# Altium PCB GTL3_Inverter.PcbDoc
Units mm, origin at the board's own origin, x right, y up, seen from the top; angles counter-clockwise.
Board outline 63.5 x 37.97 mm, 2 copper layers (Top Layer, Bottom Layer), stack 1.544 mm thick; 11 components, 12 nets, 42 pads, 11 vias.
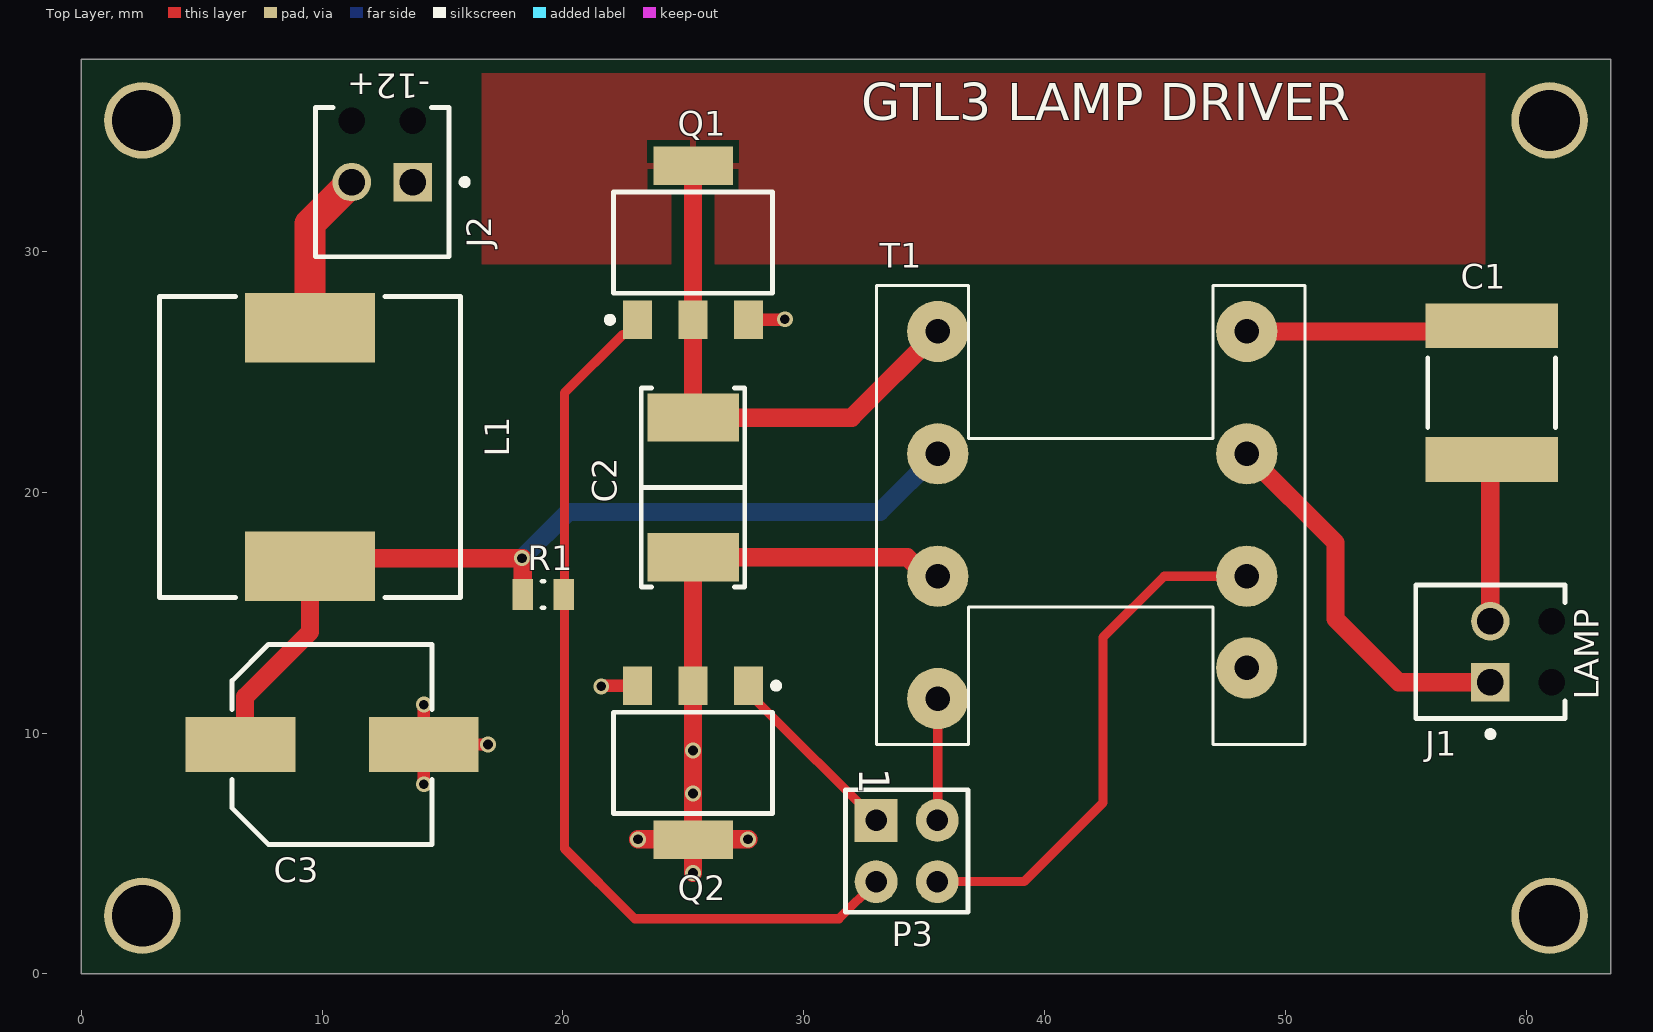
[diagram p0: Top Layer view]
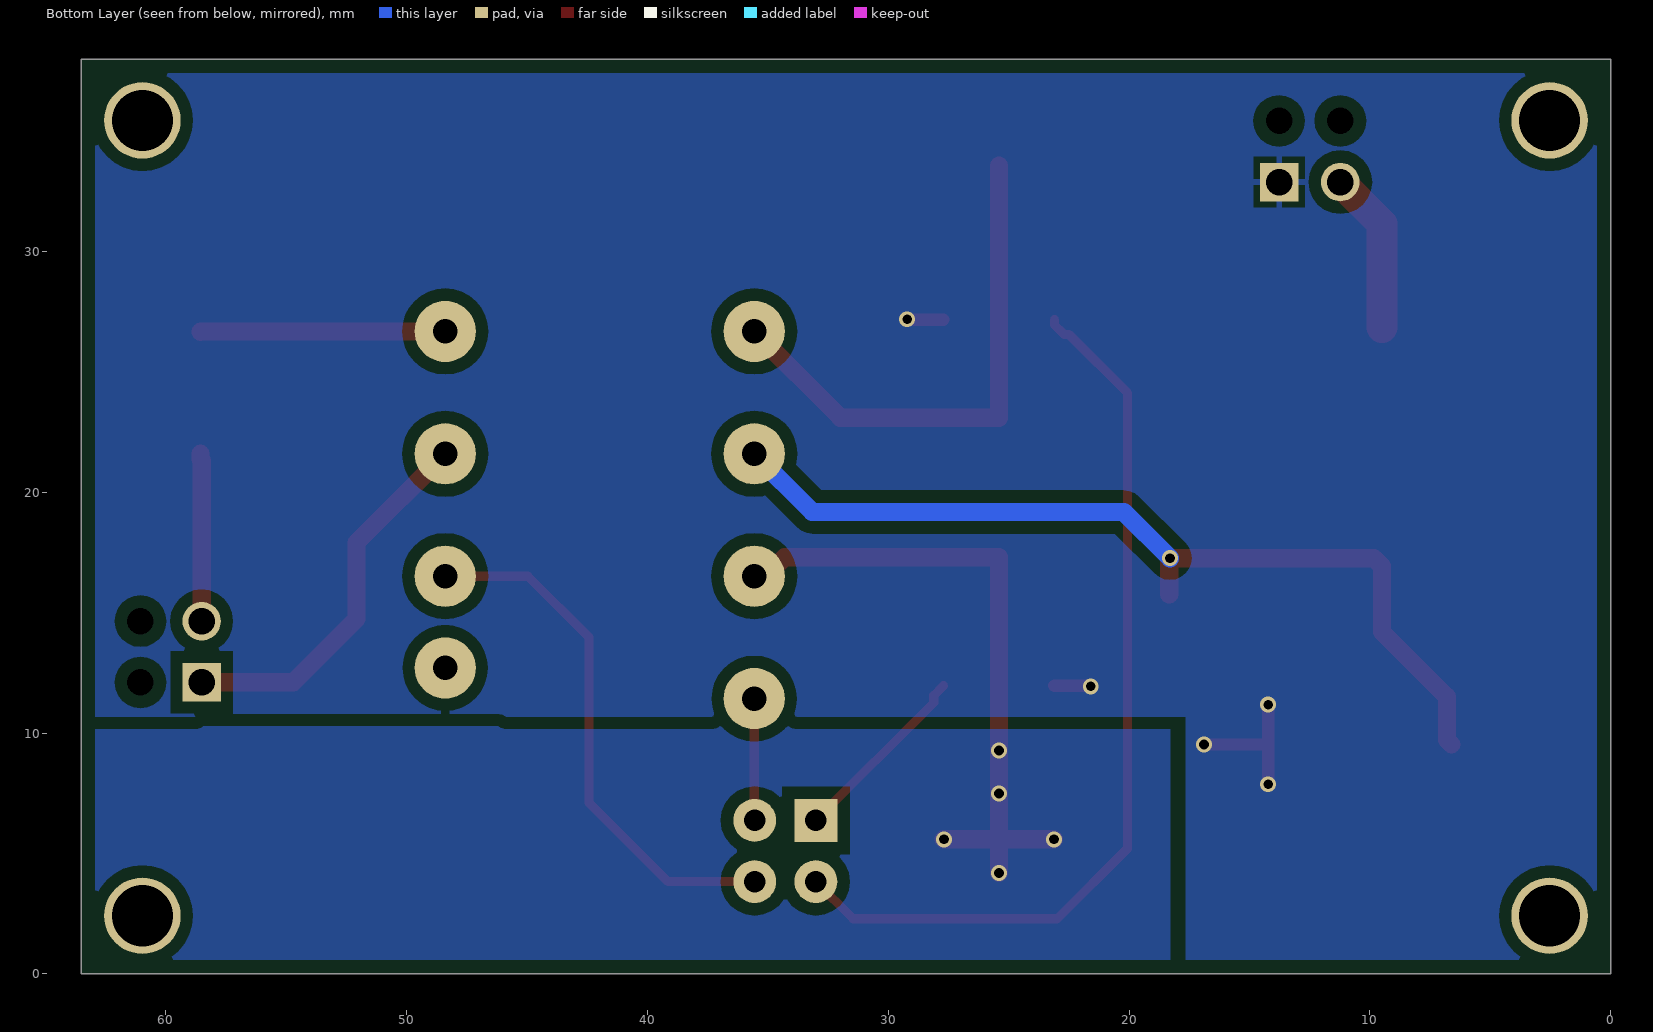
[diagram p1: Bottom Layer view, seen from below]
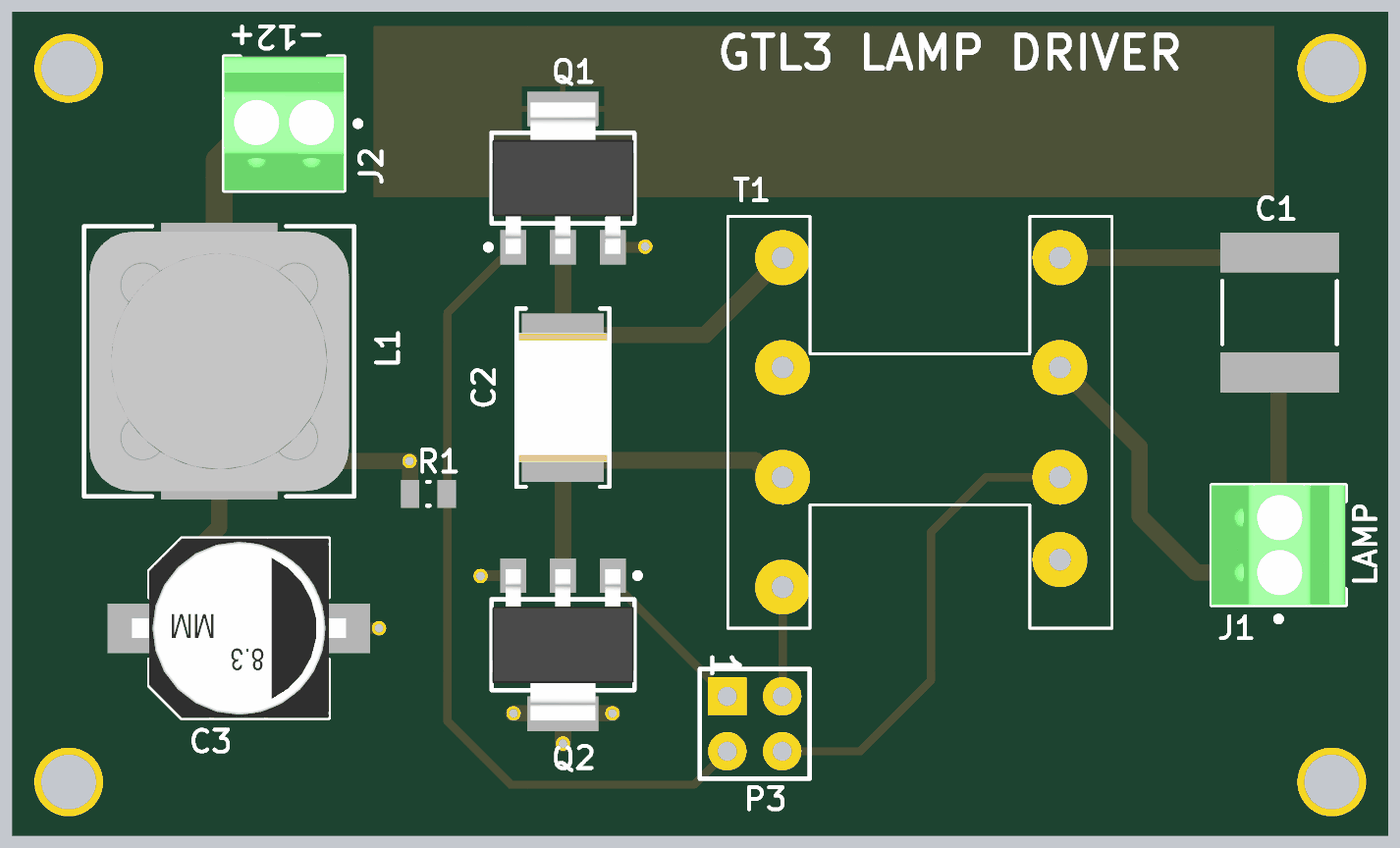
[diagram p2: 3D render of the assembled board from above, using the file's embedded part models]

## Layer stack, top to bottom
Top Solder: solder mask 0.0102, Solder Resist, Dk 3.5
Top Layer: signal copper 0.0356
Dielectric1: core 1.4732, FR-4, Dk 4.8
Bottom Layer: signal copper 0.0356
Bottom Solder: solder mask 0.0102, Solder Resist, Dk 3.5

## Board outline
0,0 0,37.973 63.5,37.973 63.5,0

## Design rules (kind name [scope] priority, off if disabled: settings)
Clearance [All vs InPolygon] p1: gap=0.508 ignorepadtopadclearanceinfootprint=FALSE except(0: Arc-Hole Track-Hole SMDPad-Hole THPad-Hole Via-Hole Fill-Hole Poly-Hole Region-Hole Text-Hole)
ComponentClearance [All] p1 off: gap=0.254 collisioncheckmode=3 verticalgap=0.254 showdistances=FALSE
PlaneClearance [All] p1: clearance=0.635
PlaneConnect [All] p1: pad.planeconnectstyle=Relief pad.reliefexpansion=0.508 pad.reliefentries=4 pad.reliefconductorwidth=0.254 pad.reliefairgap=0.254 via.planeconnectstyle=Direct via.reliefexpansion=0.508 via.reliefentries=4 via.reliefconductorwidth=0.254 via.reliefairgap=0.254
PolygonConnect [All] p1: thpad.connectstyle=Relief thpad.reliefconductorwidth=0.254 thpad.reliefentries=4 thpad.polygonreliefangle="90 Angle" thpad.airgapwidth=0.254 smdpad.connectstyle=Relief smdpad.reliefconductorwidth=0.254 smdpad.reliefentries=4 smdpad.polygonreliefangle="90 Angle" smdpad.airgapwidth=0.254 via.connectstyle=Direct via.reliefconductorwidth=0.254 via.reliefentries=4 via.polygonreliefangle="90 Angle" via.airgapwidth=0.254
RoutingVias [All] p1: holewidth=0.711 width=1.27 viastyle="Through Hole" minholewidth=0.711 minwidth=1.27 maxholewidth=0.711 maxwidth=1.27
SolderMaskExpansion [IsVia] p1: expansion=-2.54 istentingtop=FALSE
Width [All] p1: maxlimit=1.27 minlimit=0.254 preferedwidth=0.381
27 further rules are at their usual default settings.

## Components (designator, comment, footprint, x,y, rotation, side; value= is the part's Value field where it differs from the comment)
C1 "0.33uF 63Vac" CAPC6050X33M 58.547,24.13 r270 top
C2 "0.22µF" "CAP FILM 2416" 25.4,20.193 r90 top
C3 "100µF" "CAP ALSMD 8.3MM H10.5MM" 10.414,9.525 r0 top
J1 "1725656" PHOE-1725656-2 58.5,13.373 r90 top
J2 "1725656" PHOE-1725656-2 12.5,32.873 r180 top
L1 "7447709221" WE-PD-XXL 9.5,21.873 r270 top
P3 "Header 2X2" HDR2X2 33,6.373 r270 top
Q1 "FZT853TA" DIOD-SOT223-4_V 25.4,30.353 r90 top
Q2 "FZT853TA" DIOD-SOT223-4_V 25.4,8.763 r270 top
R1 "1K8" RESC0805(2012)_L 19.177,15.748 r180 top value="1800.00 Ohm"
T1 "Trans5_Royer" PCB1808B1 35.56,26.67 r0 top

## Footprints (in the part's own frame and the unit in brackets; to place one, negate y for a bottom-side part, rotate by r counter-clockwise, add the part's x,y. Pads: shape width x height; smd on the part's side, far side on the other; paste and mask are expansions set on the pad)
"CAP ALSMD 8.3MM H10.5MM" [mm] "Aluminum Electrolytic Capacitor, Body 8.30x8.30x10.50mm, IPC Low Density"
  rect 4.55x2.3 smd: 1(-3.8,0) 2(3.8,0)
  silkscreen extent -4.15,-4.15 4.15,4.15, body extent -4.95,-4.15 4.95,4.15, height 10.5
"CAP FILM 2416" [mm] "D1, Film Capacitor PPS, 2-Leads, Body 6.00x4.10mm, IPC Medium Density"
  rect 2x3.8 smd: 1(-2.9,0) 2(2.9,0)
  silkscreen extent -4.13,-2.15 4.13,2.15, body extent -3,-2.05 3,2.05, height 2.2
CAPC6050X33M [mm] "Film Capacitor, 2-Leads, Body 6.00x5.00mm, IPC Low Density"
  rect 1.85x5.5 smd: 1(-2.775,0) 2(2.775,0)
  silkscreen extent -1.45,-2.65 1.45,2.65, body extent -3.15,-2.7 3.15,2.7, height 3.3
DIOD-SOT223-4_V [mm] "SOT223, 4-Leads, Body 6.55x3.55mm, Pitch 2.3mm"
  rect 1.6x1.2 smd: 1(-3.2,2.3) 2(-3.2,0) 3(-3.2,-2.3)
  rect 1.6x3.3 smd: 4(3.2,0)
  silkscreen extent -3.32,-3.3 2.1,3.57, body extent -3.5,-3.27 3.5,3.27, height 1.65
HDR2X2 [mil] "Connector; Header; 2x2 Position"
  rect 70x70 hole 35: 1(0,0)
  round 70 hole 35: 2(0,100) 3(100,0) 4(100,100)
  silkscreen extent -50,-50 150,150
PCB1808B1 [mil] "Mag Inc Bobbin"
  round 100 hole 40: 1(0,0) 2(0,-200) 3(0,-400) 4(0,-600) 5(505,-550) 6(505,-400) 7(505,-200) 8(505,0)
  silkscreen extent -100,-675 600,75
PHOE-1725656-2 [mm] "Connector, 2-Leads, Body 6.2x5.4mm, Pitch 2.54mm"
  rect 1.6x1.6 hole 1.1: 1(-1.27,0)
  round 1.6 hole 1.1: 2(1.27,0)
  round 0 hole 1.1 unplated: MH1(-1.27,-2.54) MH2(1.27,-2.54)
  silkscreen extent -3.54,-3.1 2.77,3.1, body extent -2.77,-3.1 2.77,3.1, height 9
RESC0805(2012)_L [mm] "Chip Resistor, Body 2.0x1.3mm, IPC High Density"
  rect 0.85x1.3 smd: 1(-0.85,0) 2(0.85,0)
  silkscreen extent -0.05,-0.55 0.05,0.55, body extent -1.1,-0.67 1.1,0.68, height 0.7
WE-PD-XXL [mm] "SMD Inductor, 2-Leads, Body 12.0 x 12.0 mm"
  rect 2.9x5.4 smd: 1(-4.95,0) 2(4.95,0)
  silkscreen extent -6.25,-6.25 6.25,6.25, body extent -6,-6 6,6, height 10.36

## Part data
C1: library part CMP-001-00084-1, "Film Capacitors 100Vdc 0.33uF 10% AEC-Q200", Capacitance=330nF, Case Code (Imperial)=2220, Case Code (Metric)=5750, Dielectric Material=Polyester, Max Operating Temperature=125°C, Min Operating Temperature=-55°C, Tolerance=10%, Voltage Rating=100V, Voltage Rating (AC)=63V, Case/Package=2220, Features="High Temperature", Height - Seated (Max)=0.129inch, Length=0.236inch, Mount="Surface Mount", Packaging="Cut Tape", REACH SVHC="No SVHC", Termination=Solder, Voltage Rating (DC)=100V, Width=0.197inch
C2: library part ECH-U1H224GX9, "CAP FILM 0.22UF 2% 50VDC 2416", Device Package="2416 (6041 Metric)", Dielectric Material="Polyphenylene Sulfide (PPS), Metallized - Stacked", Manufacturer="Panasonic Electronic Components", Operating Temperature="-55°C ~ 125°C", Supplier Part Number 1=PCF1556CT-ND, Tolerance=±2%, Voltage Rating - DC=50V, Applications="General Purpose", Capacitance=0.22µF, ComponentLink1Description=Datasheet, ComponentLink1URL=http://industrial.panasonic.com/www-cgi/jvcr13pz.cgi?E+PZ+3+ABD0013+ECHU1H224GX9+7+WW, ComponentLink2Description="DigiKey Link", ComponentLink2URL=http://digikey.com/product-detail/en/panasonic-electronic-components/ECH-U1H224GX9/PCF1556CT-ND/1630919, Height - Seated (Max)="0.118\" (3.00mm)", LastUpdated="21/01/2020 3:58:38 AM", Lifecycle Status=Active, Minimum Order=1, Mounting Type="Surface Mount", Package / Case="2416 (6041 Metric)", Packaging=TapeAndReel, Part Number=ECH-U1H224GX9, Part Status=Active, Price=0.48, Series=ECH-U(X), Size / Dimension="0.236\" L x 0.161\" W (6.00mm x 4.10mm)", Supplier 1=DigiKey, Termination="Solder Pads"
C3: library part EDH107M050A9MAA, "CAP ALUM SMD 105C 100UF 50VDC", Device Package="Radial, Can - SMD", Lifetime @ Temp.="2000 Hrs @ 105°C", Manufacturer=KEMET, Operating Temperature="-40°C ~ 105°C", Ripple Current @ High Frequency="300mA @ 10kHz", Ripple Current @ Low Frequency="240mA @ 120Hz", Supplier Part Number 1=399-18136-1-ND, Tolerance=±20%, Voltage - Rated=50V, Applications="General Purpose", Capacitance=100µF, ComponentLink1Description=Datasheet, ComponentLink1URL=https://api.kemet.com/component-edge/download/datasheet/EDH107M050A9MAA.pdf, ComponentLink2Description="DigiKey Link", ComponentLink2URL=http://digikey.com/product-detail/en/kemet/EDH107M050A9MAA/399-18136-1-ND/9354337, Height - Seated (Max)="0.413\" (10.50mm)", LastUpdated="21/01/2020 4:02:50 AM", Lifecycle Status=Active, Minimum Order=1, Mounting Type="Surface Mount", Package / Case="Radial, Can - SMD", Packaging=TapeAndReel, Part Number=EDH107M050A9MAA, Part Status=Active, PartId=7635, Polarization=Polar, Price=0.22, Series=EDH, Size / Dimension="0.315\" Dia (8.00mm)", Supplier 1=DigiKey, Surface Mount Land Size="0.327\" L x 0.327\" W (8.30mm x 8.30mm)"
J1 J2: library part CMP-2000-05299-1, "Male Header, Pitch 2.54 mm, 1 x 2 Position, Height 9 mm, Tail Length 3.5 mm", Colour=Green, Manufacturer="Phoenix Contact", Content=250pc(s), Datasheet URL=http://datasheet.octopart.com/1725656-Phoenix-Contact-datasheet-5302866.pdf, Datasheet Version=Apr-08, Industrial packaging=Yes, Manufacturer part No.=1725656, Manufacturer URL=http://www.phoenixcontact.com/, Number of contacts=2, Pitch=2.54mm, Type=MPT0,5/2-2,54
L1: library part CMP-0227-00173-1, "SMD-Shielded Power Inductor WE-PD, L = 220 µH", AML Part Number=IND-S0011, Inductance="220 µH", Supplier Part Number 1=732-1696-6-ND, ComponentLink1Description="Manufacturer Link", ComponentLink1URL=http://www.we-online.com, ComponentLink2Description=Datasheet, ComponentLink2URL=http://www.we-online.de/katalog/media/pdf/7447709221.pdf, DatasheetVersion="ver 1, Oct-2004", PackageDescription="SMD Inductor, 2-Leads, Body 12.0 x 12.0 mm", PackageReference=WE-PD-XXL, PackageVersion=2004, Supplier 1=Digi-Key
P3: "Header, 2-Pin, Dual row", LatestRevisionDate=17-Jul-2002, LatestRevisionNote="Re-released for DXP Platform.", Publisher="Altium Limited"
Q1 Q2: library part CMP-2000-06300-1, "NPN Medium Power Transistor, 100 V, 6 A, -55 to 150 degC, 4-Pin SOT223, RoHS, Tape and Reel", Collector- Base Voltage VCBO=200V, Collector- Emitter Voltage VCEO Max=100V, Collector-Emitter Saturation Voltage=340mV, Continuous Collector Current=6A, DC Current Gain hFE Max=100, Emitter- Base Voltage VEBO=7V, Manufacturer=DiodesIncorporated, Maximum DC Collector Current=10A, Maximum Operating Temperature=+150C, Minimum Operating Temperature=-55C, Package / Case=SOT-223, Package Description="4-Pin Small Outline Transistor, Body 6.5 x 3.5 mm, Pitch 2.3 mm", Package Reference=SOT223-4, Package Version=06/2015, Pd - Power Dissipation=3W, Brand=DiodesIncorporated, Configuration=Single, Datasheet URL=http://www.diodes.com/_files/datasheets/FZT853.pdf, Datasheet Version="Rev. 5-3, 05/2015", DC Collector/Base Gain hfe Min=20at10A,2V, Factory Pack Quantity=1000, Gain Bandwidth Product fT=130MHz, Height=1.65mm(Max), Length=6.7mm(Max), Manufacturer URL=http://www.diodes.com/, Mounting Style=SMD/SMT, Mounting Technology=SurfaceMount, Package URL=http://www.diodes.com/_files/packages/SOT223.pdf, Packaging=Reel, Product Category=BipolarTransistors-BJT, RoHS=True, Series=FZT853, Transistor Polarity=NPN, Unit Weight=0.000282oz, Width=3.7mm(Max)
R1: library part CMP-1013-00537-1, "1K8 0.125W 1% 0805 (2012 Metric)  SMD", AML Part Number=RES-S0005, Case-EIA=0805, Case-Metric=2012, Power="0.125 W", Tolerance="1 %", Technology=SMT
T1: "Four-winding Transformer (Non-Ideal)", LatestRevisionDate=17-Jul-2002, LatestRevisionNote="Re-released for DXP Platform.", PackageDescription="Transformer; 8 Leads", PackageReference=TRF_8, Published=25-Jan-2001, Publisher="Altium Limited", Sim Note="Enter the turns ratios, Core loss resistance, Magnetising Reactance, Leakage Reactances and Resistances referred to the primary side into the parameter fields."

## Free pads (board coordinates)
  round 3.175 hole 2.54 unplated: MH1(2.54,2.413) MH2(60.96,2.413) MH3(60.96,35.433) MH4(2.54,35.433)

## Via types
v1: diameter 0.66, hole 0.406, Top Layer to Bottom Layer, 11 vias

## Nets (pads, with @x,y where several pads share a name; then routed paths per layer and width w, separated by ;. In a path a pad name is that pad's centre, name@x,y a point inside that pad or via, vN(x,y) a via of type N, cw(c..) or ccw(c..) an arc to the next point about the centre after c; other vN are vias at no path point)
GND: C3.2 J2.1 Q1.3 Q2.3 | length 9
  Top Layer w0.508: v1(14.224,7.874) C3.2@14.224,9.525 ; v1(14.224,11.176) C3.2@14.224,9.525 ; v1(16.891,9.525) C3.2@14.224,9.525 ; v1@21.59,11.963 Q2.3 ; Q1.3 v1@29.21,27.153
  other v1: 21.59,11.938 29.21,27.178
NetC1_1: C1.1 T1.8 | length 10.2
  Top Layer w0.762: T1.8 58.532,26.67 C1.1@58.547,26.655
NetC1_2: C1.2 J1.2 | length 7
  Top Layer w0.762: J1.2 58.5,21.308 C1.2 C1.2@58.547,21.605
NetC2_1: C2.1 Q2.2 Q2.4 T1.3 | length 28.2
  Top Layer w0.762: v1(23.114,5.588) Q2.4@25.4,5.588 ; v1(25.4,4.191) Q2.4 Q2.4@25.4,5.588 ; v1(27.686,5.588) Q2.4@25.4,5.588 ; T1.3 35.079,16.51 34.296,17.293 C2.1 Q2.2 Q2.4@25.4,5.588
  other v1: 25.4,7.493 25.4,9.271
NetC2_2: C2.2 Q1.2 Q1.4 T1.1 | length 22.1
  Top Layer w0.762: Q1.4 Q1.2 C2.2 31.983,23.093 T1.1
NetC3_1: C3.1 L1.2 R1.2 T1.2 | length 38.1
  Top Layer w0.762: C3.1 6.8,9.711 6.8,11.499 9.5,14.199 L1.2 9.835,17.258 v1(18.302,17.258) ; R1.2 v1@18.327,17.258
  Bottom Layer w0.762: v1(18.302,17.258) 20.221,19.177 33.147,19.177 T1.2
NetJ1_1: J1.1 T1.7 | length 15.9
  Top Layer w0.762: T1.7 52.07,17.907 52.07,14.732 54.699,12.103 J1.1
NetJ2_2: J2.2 L1.1 | length 6.8
  Top Layer w1.27: L1.1 9.5,31.143 J2.2
NetP3_1: P3.1 Q2.1 | length 7.8
  Top Layer w0.381: Q2.1 28.11,11.553 28.11,11.263 P3.1
NetP3_2: P3.2 T1.4 | length 5.1
  Top Layer w0.381: P3.2 35.56,6.393 T1.4
NetP3_3: P3.3 Q1.1 R1.1 | length 38.1
  Top Layer w0.381: Q1.1 23.1,26.953 22.69,26.543 22.49,26.543 20.066,24.119 20.066,15.748 20.066,5.207 22.987,2.286 31.453,2.286 P3.3
NetP3_4: P3.4 T1.6 | length 22.1
  Top Layer w0.381: P3.4 39.139,3.833 42.418,7.112 42.418,13.97 44.958,16.51 T1.6
pads on no net: J1.MH1 J1.MH2 J2.MH1 J2.MH2 T1.5

## Polygon pours and split planes (outlines as drawn)
NetC2_1 on Bottom Layer "NETC2_1_L02_P003" (solid, pour order 3): 18.288,0.127 18.288,10.287 63.5,10.287 63.5,0.127
GND on Bottom Layer "GND_L02_P000" (solid, pour order 0): 0,0 0,37.973 18.415,37.973 63.5,37.973 63.5,10.668 17.653,10.668 17.653,0
NetC2_2 on Top Layer "NETC2_2_L01_P001" (solid, pour order 1): 16.637,37.973 16.637,29.464 58.293,29.464 58.293,37.973

## Silkscreen, mask and mechanical layers (free items; w line width, h text height)
Top Overlay:
  text "-12+" at 14.5,37.373 h1.02 r180
  text "GTL3 LAMP DRIVER" at 32.385,35.433 h1.52
  text "LAMP" at 63,11.373 h1.02 r90
Board Outline:
  the board outline again, w0.127

## Text inside footprints (layer, text, board x,y; h text height)
P3: Top Overlay "1" at 32.295,8.55 h1.27 r270